# Allegro board mithrilpoosack_alt.brd
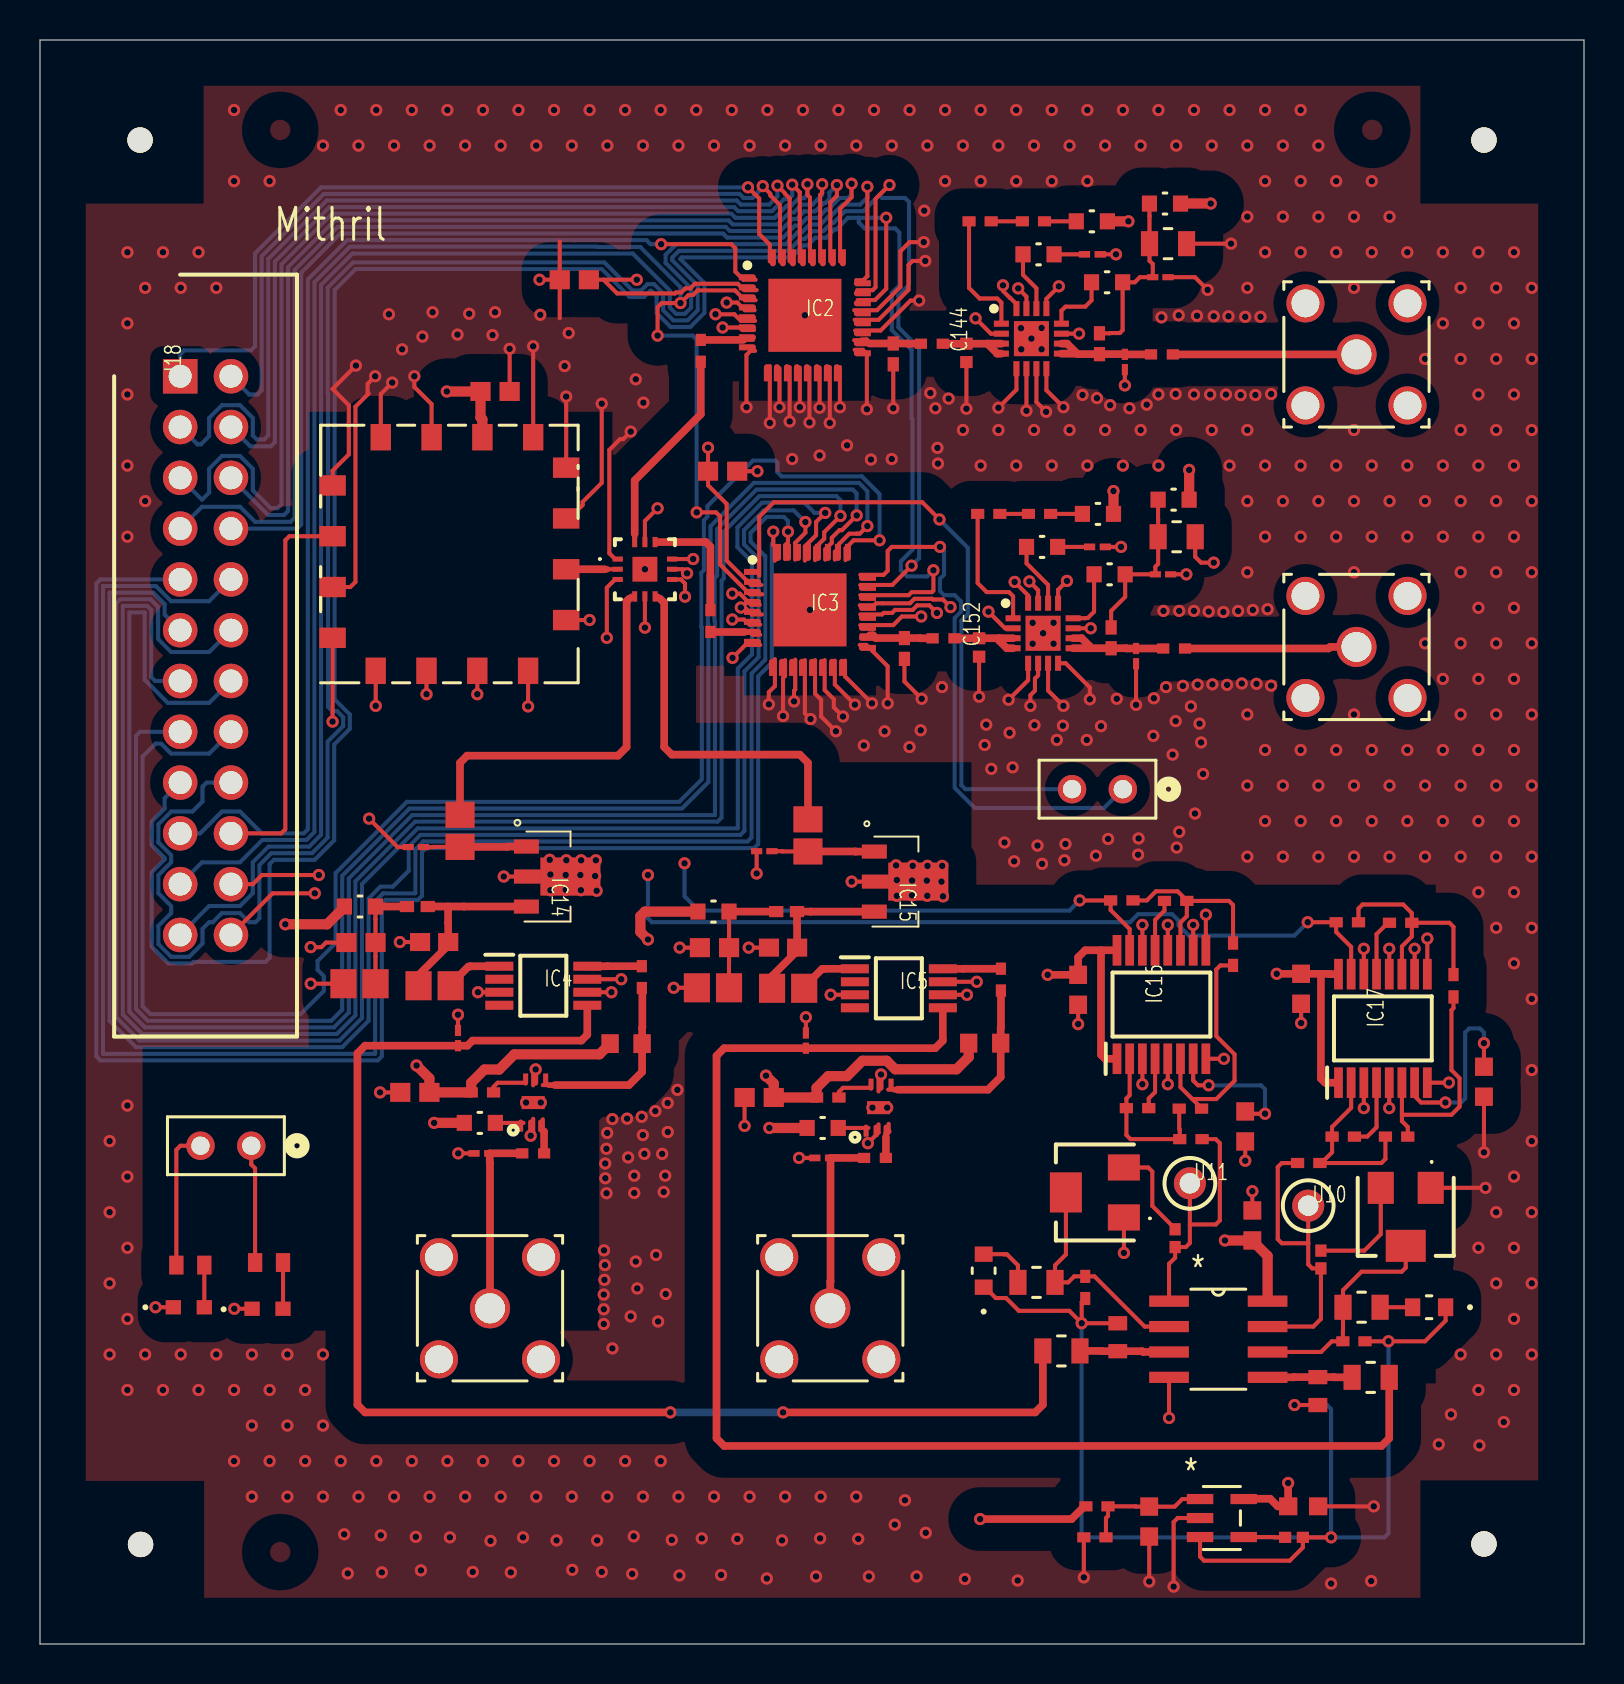
[diagram p0: board, top side]
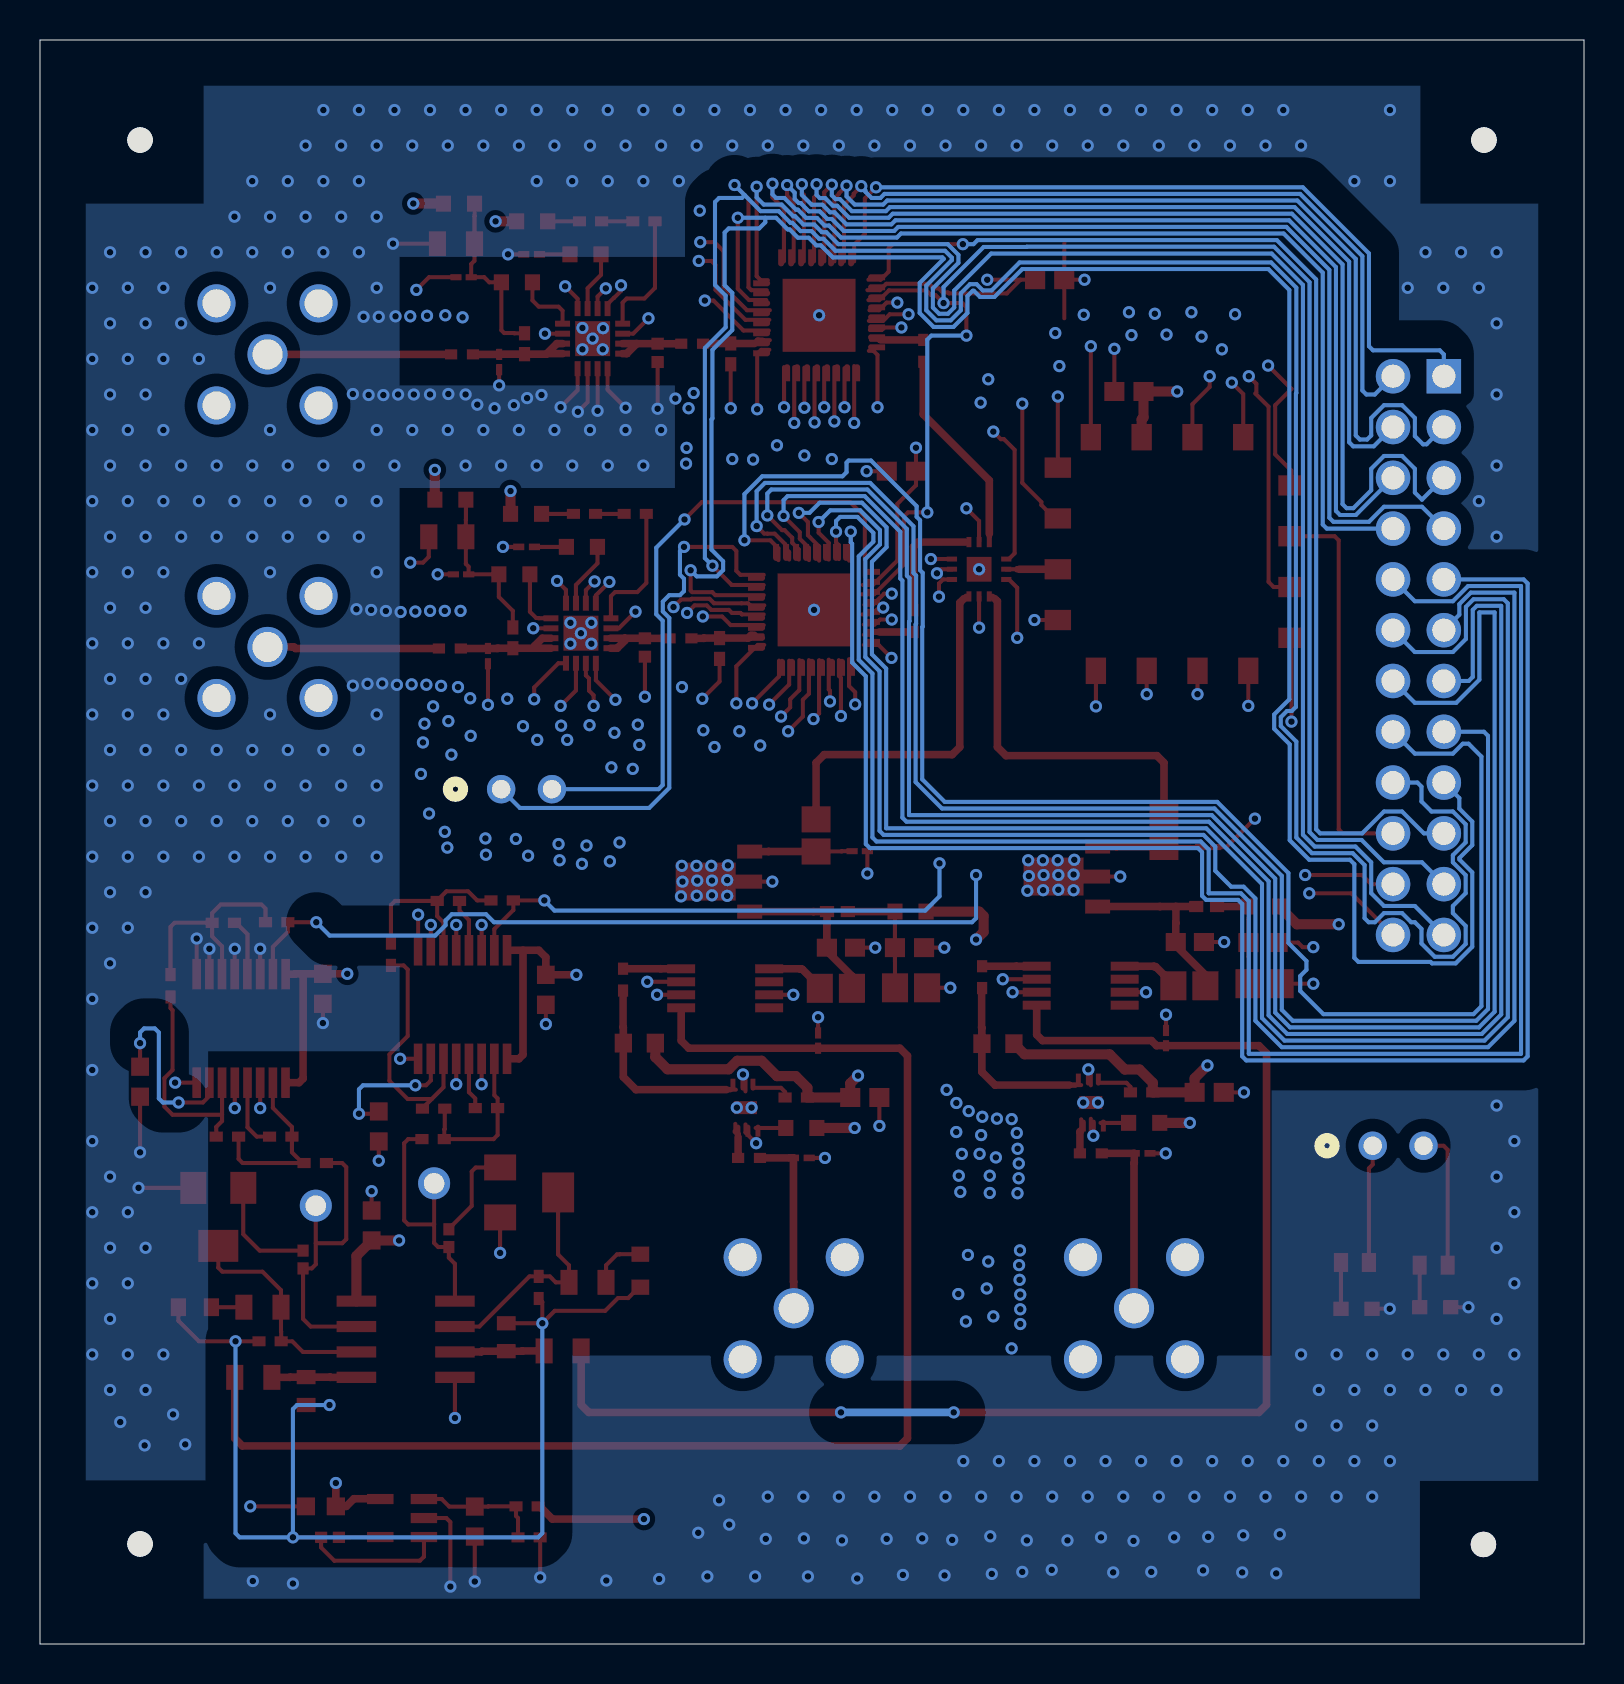
[diagram p1: board, bottom side, seen from below]

Outline 77.22 x 80.21 mm; copper layers: TOP, GND, PWR, BOTTOM. Coordinates in mm from the lower left corner of the outline.
Outline path: 0,80.21 77.22,80.21 77.22,0 0,0 0,80.21

## Design rules (mm)
constraint set DEFAULT: min track width 0.203

## Placement (name value [footprint] x y rotation side)
C89  22 pF  [CAPC220145_90N_KEM]  38.4 40.44 270 top
C91  22 pF  [CAPC220145_90N_KEM]  37.41 32.79 0 top
C92  1.1pF  [CAPC17090_87N_KEM]  37.16 34.82 0 top
C94  2.2uF  [CAPC220145_140N_KEM]  33.66 32.82 0 top
C107  22 pF  [CAPC220145_90N_KEM]  21.01 40.67 270 top
C109  100pF  [G-033_MUR]  38.3 30.18 270 top
C110  1.1pF  [CAPC17090_87N_KEM]  19.71 35.1 0 top
C111  2.2uF  [CAPC220145_140N_KEM]  15.98 33.02 0 top
C112  100pF  [G-033_MUR]  20.9 30.3 90 top
C124  1.5pF  [G-033_MUR]  18.8 39.85 0 top
C125  1.5pF  [G-033_MUR]  36.22 39.65 0 top
C127  0.1 uF  [CAPC17595_95N_KEM]  16.05 35.08 0 top
C128  0.1 uF  [CAPC17595_95N_KEM]  33.73 34.82 0 top
C130  100nF  [CAP_885012206_WRE]  55.47 6.12 90 top
C131  100nF  [CAP_885012206_WRE]  63.17 6.88 180 top
C132  47uF  [CAP_CL21_SAM]  49.83 18.08 0 top
C133  10uF  [CAP_CL21_SAM]  51.08 14.66 0 top
C134  100nF  [CAP_885012206_WRE]  60.63 20.93 270 top
C135  10uF  [CAP_CL21_SAM]  66.55 13.34 0 top
C136  47uF  [CAP_CL21_SAM]  66.09 16.84 180 top
C143  1.8pF  [G-155_MUR]  44.6 65.02 0 top
C144  3pF  [CAPC1005X55N]  46.33 64.57 90 top
C145  10uF  [CAP_CL21_SAM]  56.41 70.03 0 top
C146  100pF  [G-033_MUR]  56.03 68.35 180 top
C147  3.3pF  [G-033_MUR]  54.25 64.11 90 top
C148  33pF  [G-155_MUR]  56.11 64.49 0 top
C149  10uF  [CAP_CL21_SAM]  56.85 55.37 0 top
C150  100pF  [G-033_MUR]  56.16 53.49 180 top
C151  1.8pF  [G-155_MUR]  45.19 50.29 0 top
C152  3pF  [CAPC1005X55N]  46.96 49.83 90 top
C153  33pF  [G-155_MUR]  56.72 49.78 0 top
C154  3.3pF  [G-033_MUR]  54.81 49.4 90 top
C155  33pF  [G-155_MUR]  24.66 24.54 0 top
C156  0.1 uF  [CAPC17595_95N_KEM]  18.75 27.58 0 top
C157  33pF  [G-155_MUR]  30.1 33.35 90 top
C158  0.1 uF  [CAPC17595_95N_KEM]  35.97 27.33 0 top
C159  33pF  [G-155_MUR]  41.76 24.31 0 top
C160  33pF  [G-155_MUR]  48.06 33.22 90 top
C161  33pF  [G-155_MUR]  33.05 64.67 90 top
C162  33pF  [G-155_MUR]  33.53 51.16 270 top
C163  0.1 uF  [CAPC17595_95N_KEM]  22.76 62.64 0 top
C164  0.1 uF  [CAPC17595_95N_KEM]  26.72 68.22 180 top
C165  0.1 uF  [CAPC17595_95N_KEM]  34.14 58.65 0 top
C166  22 pF  [CAPC220145_90N_KEM]  19.74 32.92 180 top
C167  100nF  [CAP_885012206_WRE]  60.27 25.88 90 top
C168  100nF  [CAP_885012206_WRE]  51.92 32.72 90 top
C169  100nF  [CAP_885012206_WRE]  63.07 32.77 90 top
C170  100nF  [CAP_885012206_WRE]  72.21 28.12 90 top
IC2  PE44820B-X  [QFN50P500X500X90-33N-D]  38.25 66.45 0 top
IC3  PE44820B-X  [QFN50P500X500X90-33N-D]  38.51 51.71 0 top
IC4  HMC400MS8ETR  [SOP65P488X110-8N]  25.17 32.92 0 top
IC5  HMC400MS8ETR  [SOP65P488X110-8N]  42.95 32.79 0 top
IC8  WP4P1+  [WP4P1]  30.25 53.75 0 top
IC9  GRF5112  [QFN50P300X300X90-17N]  49.58 65.28 0 top
IC10  GRF5112  [QFN50P300X300X90-17N]  50.16 50.55 0 top
IC12  GRF2133W  [SON50P150X150X50-7N-D]  41.94 26.82 90 top
IC13  GRF2133W  [SON50P150X150X50-7N-D]  24.66 27.08 90 top
IC14  -  [MMG3014NT1]  25.43 38.38 270 top
IC15  -  [MMG3014NT1]  42.82 38.13 270 top
IC16  LTC1563-2IGN#PBF  [SOP64P601X175-16N]  56.08 31.98 90 top
IC17  LTC1563-2IGN#PBF  [SOP64P601X175-16N]  67.16 30.78 90 top
J6  CONN_001P_000C_1  [CONN_RF2-04A-T-00-50-G_ADM]  22.5 16.79 0 top
J7  CONN_001P_000C_1  [CONN_RF2-04A-T-00-50-G_ADM]  39.52 16.79 0 top
J8  CONN_001P_000C_1  [CONN_RF2-04A-T-00-50-G_ADM]  65.84 64.49 0 top
J9  CONN_001P_000C_1  [CONN_RF2-04A-T-00-50-G_ADM]  65.84 49.86 0 top
J18  1-5103308-3  [SHDR24W66P254_2X12_3797X914X986P]  7.01 63.4 90 top
J19  CONN2_M20-999_1x2  [CONN2_M20-999_1X2_HRW]  10.57 24.92 0 top
J20  CONN2_M20-999_1x2  [CONN2_M20-999_1X2_HRW]  54.15 42.75 0 top
L17  2nH  [IND_LQG15_MUR]  42.67 64.52 270 top
L18  3nH  [IND_LQP03TN_MUR]  52.63 69.49 180 top
L19  10nH  [IND_LQG15HS10NJ02D_MUR]  52.98 65.02 270 top
L20  3nH  [IND_LQP03TN_MUR]  52.88 54.86 180 top
L21  10nH  [IND_LQG15HS10NJ02D_MUR]  53.57 50.32 270 top
L22  2nH  [IND_LQG15_MUR]  43.23 49.78 270 top
L23  18nH  [IND_LQP03TN_MUR]  22.1 24.54 180 top
L24  33nH  [IND_LQG18HN_MUR]  29.31 30.02 0 top
L25  IND  [IND_LQG18HN_MUR]  47.24 30.05 0 top
L26  18nH  [IND_LQP03TN_MUR]  39.14 24.31 180 top
L27  15nH  [IND_LQG15HN_02_MUR]  37.34 36.63 0 top
L28  15nH  [IND_LQG15HN_02_MUR]  18.87 36.88 0 top
LED1  LED  [LED_LTST-C191KGKT_LTO]  11.38 16.76 0 top
LED2  LED  [LED_LTST-C191KGKT_LTO]  7.44 16.84 0 top
NOREF  -  [unnamed]  72.21 75.21 0 top
NOREF#2  -  [#2]  73.66 80.21 90 top
NOREF#3  -  [unnamed]  72.21 5 0 top
NOREF#4  -  [#2]  0 80.21 0 top
NOREF#5  -  [#2]  -43.41 -68.45 0 top
NOREF#6  -  [#2]  0 156.87 0 top
NOREF#7  -  [unnamed]  5 75.21 0 top
NOREF#8  -  [#2]  77.22 0 90 top
NOREF#9  -  [unnamed]  5.03 4.98 0 top
R18  47K  [RC0402N_PAN]  52.86 6.88 0 top
R19  47K  [RC0402N_PAN]  52.76 5.33 180 top
R21  1k  [STA_RMCF0402_STP]  56.77 20.29 270 top
R23  1.5k  [RC0402N_PAN]  52.27 17.83 270 top
R44  4.7k  [STA_RMCF0603_STP]  53.9 15.34 90 top
R45  4.7k  [STA_RMCF0603_STP]  63.91 12.65 270 top
R46  1k  [STA_RMCF0402_STP]  64.06 19.23 270 top
R47  50  [RES_RT0603_YAG]  47.19 18.67 90 top
R50  1.5k  [RC0402N_PAN]  65.71 15.14 0 top
R51  50  [RES_RT0603_YAG]  69.47 16.84 180 top
R52  0  [RC0603N_PAN]  33.68 36.63 0 top
R55  0  [RC0603N_PAN]  16 36.88 0 top
R76  3k  [RC0603N_PAN]  52.6 71.15 180 top
R77  2k  [RC0402N_PAN]  49.68 71.15 180 top
R78  1.5k  [RC0402N_PAN]  47.02 71.15 180 top
R79  0  [RC0603N_PAN]  49.94 69.49 180 top
R80  0  [RC0603N_PAN]  56.26 72.03 180 top
R81  0  [RC0603N_PAN]  53.37 68.1 0 top
R82  0  [RC0603N_PAN]  56.69 57.23 180 top
R83  3k  [RC0603N_PAN]  52.91 56.52 180 top
R84  0  [RC0603N_PAN]  50.11 54.86 180 top
R85  2k  [RC0402N_PAN]  49.99 56.52 180 top
R86  1.5k  [RC0402N_PAN]  47.45 56.52 180 top
R87  0  [RC0603N_PAN]  53.49 53.49 0 top
R88  3k  [RC0603N_PAN]  22 26.06 0 top
R89  75  [RC0402N_YAG]  22.12 27.58 0 top
R90  3k  [RC0603N_PAN]  39.14 25.81 0 top
R91  75  [RC0402N_YAG]  39.4 27.33 0 top
R94  1k  [STA_RMCF0603_STP]  11.46 19.08 0 top
R95  1k  [STA_RMCF0603_STP]  7.52 18.95 0 top
R97  90.9k  [RC0402N_YAG]  57.53 26.77 180 top
R98  90.9k  [RC0402N_YAG]  57.56 25.25 0 top
R99  90.9k  [RC0402N_YAG]  59.66 34.49 270 top
R100  90.9k  [RC0402N_YAG]  56.79 37.16 0 top
R101  90.9k  [RC0402N_YAG]  54.1 37.19 0 top
R102  90.9k  [RC0402N_YAG]  54.89 26.8 180 top
R103  90.9k  [RC0402N_YAG]  65.38 36.09 0 top
R104  90.9k  [RC0402N_YAG]  65.18 25.37 180 top
R105  90.9k  [RC0402N_YAG]  68.05 36.07 0 top
R106  90.9k  [RC0402N_YAG]  67.84 25.37 180 top
R107  90.9k  [RC0402N_YAG]  70.69 32.92 270 top
R108  90.9k  [RC0402N_YAG]  63.45 24.05 180 top
R109  1k  [STA_RMCF0402_STP]  62.71 5.33 180 top
U7  MCP6001UT-IOT  [SOT-23-5_MC_MCH]  59.11 6.3 0 top
U8  LM2904_D_8  [D8]  58.93 15.24 0 top
U10  -  [5002]  63.42 21.92 0 top
U11  -  [5002]  57.51 23.04 0 top
VR1  PVG5A503C03R00  [PVG5A502C03R00]  68.3 21.36 180 top
VR2  PVG5A503C03R00  [PVG5A502C03R00]  52.76 22.58 90 top
XTAL1  CVCO55BE-1530-2700  [CVCO55BE-1530-2700_CRX]  20.47 54.51 0 top

## Library data of the parts
C89 C91 C107 C166 = C0805C220J5GAC7210: User Part Number: PN; Tolerance: TOL
C92 C110 = CBR06C119B5GAC: User Part Number: PN; Tolerance: TOL
C94 C111 = C0805C225J4RACTU: User Part Number: PN; Tolerance: TOL
C109 C112 C146 C150 = GRM0335C1H101JA01D: User Part Number: PN; Tolerance: TOL
C124 C125 = GRM0335C1H1R5CA01D: User Part Number: PN; Tolerance: TOL
C127 C128 C156 C158 C163-C165 = C0603C104J5RACTU: User Part Number: PN; Tolerance: TOL
C130 C131 C134 C167-C170 = 885012206071: User Part Number: PN; Tolerance: TOL
C132 C136 = CL21A476MRYNNNE: User Part Number: PN; Tolerance: TOL
C133 C135 C145 C149 = CL21A106KOQNNNE: User Part Number: PN; Tolerance: TOL
C143 C151 = GRM1555C1H1R8CA01D: User Part Number: PN; Tolerance: TOL
C144 C152 = GRM1555C1H3R0CA01D
C147 C154 = GRM0335C1H3R3CA01D: User Part Number: PN; Tolerance: TOL
C148 C153 C155 C157 C159-C162 = GRM1555C1H330JA01D: User Part Number: PN; Tolerance: TOL
IC2 IC3 = PE44820B-X
IC4 IC5 = HMC400MS8ETR
IC8 = WP4P1+_0
IC9 IC10 = GRF5112
IC12 IC13 = GRF2133W
IC14 IC15 = MMG3014NT1_0
IC16 IC17 = LTC1563-2IGN#PBF
J6-J9 = RF2-04A-T-00-50-G: User Part Number: PN; Tolerance: TOL
J18 = 1-5103308-3
J19 J20 = M20-9990246: User Part Number: PN; Tolerance: TOL
L17 L22 = LQG15HS2N0S02D: User Part Number: PN; Tolerance: TOL
L18 L20 = LQP03TN3N0B02D: User Part Number: PN; Tolerance: TOL
L19 L21 = LQG15HS10NJ02D: User Part Number: PN; Tolerance: TOL
L23 L26 = LQP03TN18NH02D: User Part Number: PN; Tolerance: TOL
L24 L25 = LQG18HN33NJ00D: User Part Number: PN; Tolerance: TOL
L27 L28 = LQG15HS15NJ02D: User Part Number: PN; Tolerance: TOL
LED1 LED2 = LTST-C191KGKT: User Part Number: PN; Tolerance: TOL
R18 R19 = ERJ-2RKF4702X: User Part Number: PN; Tolerance: TOL
R21 R46 R109 = RMCF0402FT1K00: User Part Number: PN; Tolerance: TOL
R23 R50 R78 R86 = ERA-2AEB152X: User Part Number: PN; Tolerance: TOL
R44 R45 = RMCF0603FT4K70: User Part Number: PN; Tolerance: TOL
R47 R51 = RT0603BRE0750RL: User Part Number: PN; Tolerance: TOL
R52 R55 R79-R82 R84 R87 = ERJ-3GEY0R00V: User Part Number: PN; Tolerance: TOL
R76 R83 R88 R90 = ERA-3AEB302V: User Part Number: PN; Tolerance: TOL
R77 R85 = ERJ-2RKF2001X: User Part Number: PN; Tolerance: TOL
R89 R91 = RC0402FR-0775RL: User Part Number: PN; Tolerance: TOL
R94 R95 = RMCF0603FT1K00: User Part Number: PN; Tolerance: TOL
R97-R108 = RC0402FR-0790K9L: User Part Number: PN; Tolerance: TOL
U7 = MCP6001UT-IOT: User Part Number: PN; Tolerance: TOL
U8 = LM2904DR: User Part Number: PN; Tolerance: TOL
U10 U11 = 5002
VR1 VR2 = PVG5A503C03R00
XTAL1 = CVCO55BE-1530-2700: User Part Number: PN; Tolerance: TOL

## Footprints (pads in the part's own frame, mm; a bottom-side part is the same pattern mirrored in y, then rotated)
5002
  round 1.6 hole 1.021: 1(0,0)
CAP_885012206_WRE
  rect 0.914x0.889 smd: 1(-0.749,0) 2(0.749,0)
CAP_CL21_SAM
  rect 0.856x1.25 smd: 1(-0.927,0) 2(0.927,0)
CAPC1005X55N
  rect 0.599x0.62 smd: 1(-0.46,0) 2(0.46,0)
CAPC17090_87N_KEM
  rect 1.006x0.899 smd: 1(-0.704,0) 2(0.704,0)
CAPC17595_95N_KEM
  rect 1.006x0.95 smd: 1(-0.729,0) 2(0.729,0)
CAPC220145_90N_KEM
  rect 1.306x1.45 smd: 1(-0.803,0) 2(0.803,0)
CAPC220145_140N_KEM
  rect 1.306x1.45 smd: 1(-0.803,0) 2(0.803,0)
CONN2_M20-999_1X2_HRW
  round 1.422 hole 0.914: 1(0,0) 2(-2.54,0)
CONN_RF2-04A-T-00-50-G_ADM
  round 1.905 hole 1.397: (-2.553,2.553) (-2.553,-2.553) (2.553,2.553) (2.553,-2.553)
  round 2.007 hole 1.499: 1(0,0)
CVCO55BE-1530-2700_CRX
  rect 1.321x1.016 smd: 1(-5.842,3.429) 2(-5.842,0.889) 3(-5.842,-1.651) 4(-5.842,-4.191) 9(5.842,-3.302) 10(5.842,-0.762) 11(5.842,1.778) 12(5.842,4.318)
  rect 1.016x1.321 smd: 5(-3.683,-5.842) 6(-1.143,-5.842) 7(1.397,-5.842) 8(3.937,-5.842) 13(4.191,5.842) 14(1.651,5.842) 15(-0.889,5.842) 16(-3.429,5.842)
D8
  rect 1.981x0.559 smd: 1(-2.464,1.905) 2(-2.464,0.635) 3(-2.464,-0.635) 4(-2.464,-1.905) 5(2.464,-1.905) 6(2.464,-0.635) 7(2.464,0.635) 8(2.464,1.905)
G-033_MUR
  rect 0.559x0.305 smd: 1(-0.381,0) 2(0.381,0)
G-155_MUR
  rect 0.61x0.508 smd: 1(-0.546,0) 2(0.546,0)
IND_LQG15_MUR
  rect 0.711x0.559 smd: 1(-0.521,0) 2(0.521,0)
IND_LQG15HN_02_MUR
  rect 0.711x0.559 smd: 1(-0.521,0) 2(0.521,0)
IND_LQG15HS10NJ02D_MUR
  rect 0.711x0.559 smd: 1(-0.521,0) 2(0.521,0)
IND_LQG18HN_MUR
  rect 0.864x0.94 smd: 1(-0.8,0) 2(0.8,0)
IND_LQP03TN_MUR
  rect 0.559x0.33 smd: 1(-0.394,0) 2(0.394,0)
LED_LTST-C191KGKT_LTO
  rect 0.762x0.711 smd: 1(-0.775,0) 2(0.775,0)
MMG3014NT1
  rect 0.701x1.25 smd: 1(-1.501,-1.1) 3(1.501,-1.1)
  rect 0.701x1.349 smd: 2(0,-1.049)
  rect 1.9x3 smd: 4(0,1.1)
PVG5A502C03R00
  rect 1.3x1.6 smd: 1(-1.25,-1.45) 3(1.25,-1.45)
  rect 1.999x1.6 smd: 2(0,1.45)
QFN50P300X300X90-17N
  rect 0.749x0.3 smd: 1(-1.501,0.749) 2(-1.501,0.249) 3(-1.501,-0.249) 4(-1.501,-0.749) 9(1.501,-0.749) 10(1.501,-0.249) 11(1.501,0.249) 12(1.501,0.749)
  rect 0.3x0.749 smd: 5(-0.749,-1.501) 6(-0.249,-1.501) 7(0.249,-1.501) 8(0.749,-1.501) 13(0.749,1.501) 14(0.249,1.501) 15(-0.249,1.501) 16(-0.749,1.501)
  rect 1.75x1.75 smd: 17(0,0)
QFN50P500X500X90-33N-D
  custom 0.851x0.3 smd: 1(-2.875,1.9) 2(-2.875,1.4) 3(-2.875,0.899) 4(-2.875,0.399) 5(-2.875,-0.099) 6(-2.875,-0.599) 7(-2.875,-1.1) 8(-2.875,-1.6) 17(2.875,-1.9) 18(2.875,-1.4) 19(2.875,-0.899) 20(2.875,-0.399) 21(2.875,0.099) 22(2.875,0.599) 23(2.875,1.1) 24(2.875,1.6)
  custom 0.3x0.851 smd: 9(-1.9,-2.875) 10(-1.4,-2.875) 11(-0.899,-2.875) 12(-0.399,-2.875) 13(0.099,-2.875) 14(0.599,-2.875) 15(1.1,-2.875) 16(1.6,-2.875) 25(1.9,2.875) 26(1.4,2.875) 27(0.899,2.875) 28(0.399,2.875) 29(-0.099,2.875) 30(-0.599,2.875) 31(-1.1,2.875) 32(-1.6,2.875)
  rect 3.65x3.65 smd: 33(0,0)
RC0402N_PAN
  rect 0.655x0.5 smd: 1(-0.554,0) 2(0.554,0)
RC0402N_YAG
  rect 0.66x0.508 smd: 1(-0.559,0) 2(0.559,0)
RC0603N_PAN
  rect 0.757x0.8 smd: 1(-0.777,0) 2(0.777,0)
RES_RT0603_YAG
  rect 0.762x0.889 smd: 1(-0.826,0) 2(0.826,0)
SHDR24W66P254_2X12_3797X914X986P
  rect 1.725x1.725 hole 1.151: 1(0,0)
  round 1.725 hole 1.151: 2(0,-2.54) 3(-2.54,0) 4(-2.54,-2.54) 5(-5.08,0) 6(-5.08,-2.54) 7(-7.62,0) 8(-7.62,-2.54) 9(-10.16,0) 10(-10.16,-2.54) 11(-12.7,0) 12(-12.7,-2.54) 13(-15.24,0) 14(-15.24,-2.54) 15(-17.78,0) 16(-17.78,-2.54) 17(-20.32,0) 18(-20.32,-2.54) 19(-22.86,0) 20(-22.86,-2.54) 21(-25.4,0) 22(-25.4,-2.54) 23(-27.94,0) 24(-27.94,-2.54)
SON50P150X150X50-7N-D
  custom 0.599x0.249 smd: 1(-1.151,0.625) 2(-1.151,0.124) 3(-1.151,-0.376) 4(1.151,-0.625) 5(1.151,-0.124) 6(1.151,0.376)
  rect 0.65x1.151 smd: 7(0,0)
SOP64P601X175-16N
  rect 1.527x0.434 smd: 1(-2.713,2.223) 2(-2.713,1.587) 3(-2.713,0.953) 4(-2.713,0.318) 5(-2.713,-0.318) 6(-2.713,-0.953) 7(-2.713,-1.587) 8(-2.713,-2.223) 9(2.713,-2.223) 10(2.713,-1.587) 11(2.713,-0.953) 12(2.713,-0.318) 13(2.713,0.318) 14(2.713,0.953) 15(2.713,1.587) 16(2.713,2.223)
SOP65P488X110-8N
  rect 1.4x0.45 smd: 1(-2.2,0.975) 2(-2.2,0.325) 3(-2.2,-0.325) 4(-2.2,-0.975) 5(2.2,-0.975) 6(2.2,-0.325) 7(2.2,0.325) 8(2.2,0.975)
SOT-23-5_MC_MCH
  rect 1.321x0.508 smd: 1(-1.092,0.95) 2(-1.092,0) 3(-1.092,-0.95) 4(1.092,-0.95) 5(1.092,0.95)
STA_RMCF0402_STP
  rect 0.61x0.559 smd: 1(-0.445,0) 2(0.445,0)
STA_RMCF0603_STP
  rect 0.711x0.94 smd: 1(-0.699,0) 2(0.699,0)
unnamed
  round 1.27 hole 3.962 unplated: (0,0)
WP4P1
  rect 0.511x0.249 smd: 1(-1.359,0.511) 2(-1.359,0) 3(-1.359,-0.511) 7(1.359,-0.511) 8(1.359,0) 9(1.359,0.511)
  rect 0.249x0.511 smd: 4(-0.511,-1.359) 5(0,-1.359) 6(0.511,-1.359) 10(0.511,1.359) 11(0,1.359) 12(-0.511,1.359)
  rect 1.24x1.24 smd: 13(0,0)

## Nets
3.3V: C131.2 C134.2 C164.1 C165.1 C168.2 C169.2 IC2.2 IC3.2 IC16.1 IC16.16 IC17.1 IC17.16 J19.2 R18.1 R95.1 U7.5 U8.8(VCC)
5.0V: C156.2 C158.2 C163.1 J19.1 L24.1 L25.1 R52.1 R55.1 R76.1 R80.1 R82.1 R83.1 R88.1 R89.1 R90.1 R91.1 R94.1 XTAL1.14
GND: C92.1 C94.1 C109.1 C110.1 C111.1 C112.2 C124.1 C125.1 C127.1 C128.1 C130.1 C131.1 C134.1 C144.1 C145.2 C146.1 C147.1 C149.2 C150.1 C152.1 C154.1 C156.1 C158.1 C163.2 C164.2 C165.2 C167.1 C168.1 C169.1 C170.1 IC2.4 IC2.5 IC2.6 IC2.8 IC2.9 IC2.10 IC2.11 IC2.12 IC2.13 IC2.14 IC2.15 IC2.16 IC2.17 IC2.19 IC2.20(VSS_EXT) IC2.21 IC2.33 IC3.4 IC3.5 IC3.6 IC3.8 IC3.9 IC3.10 IC3.11 IC3.12 IC3.13 IC3.14 IC3.15 IC3.16 IC3.17 IC3.19 IC3.20(VSS_EXT) IC3.21 IC3.33 IC4.3 IC4.6 IC4.7 IC5.3 IC5.6 IC5.7 IC8.1 IC8.3 IC8.5 IC8.7 IC8.8 IC8.9 IC8.11 IC8.13 IC9.2 IC9.5 IC9.6 IC9.7 IC9.8 IC9.11 IC9.13 IC9.15 IC9.16 IC9.17 IC10.2 IC10.5 IC10.6 IC10.7 IC10.8 IC10.11 IC10.13 IC10.15 IC10.16 IC10.17 IC12.2 IC12.5 IC12.7 IC13.2 IC13.5 IC13.7 IC14.2 IC14.4 IC15.2 IC15.4 IC16.3 IC16.5 IC16.8(V-) IC16.9 IC16.10 IC16.12 IC16.14 IC17.3 IC17.5 IC17.8(V-) IC17.9 IC17.10 IC17.12 IC17.14 L17.2 L18.1 L20.1 L22.2 L23.2 L26.2 LED1.1(CATHODE) LED2.1(CATHODE) R19.2 U7.2(VSS) U8.4 VR1.1 VR2.1 XTAL1.1 XTAL1.3 XTAL1.4 XTAL1.5 XTAL1.6 XTAL1.7 XTAL1.8 XTAL1.9 XTAL1.11 XTAL1.12 XTAL1.13 XTAL1.15 XTAL1.16
1OUT: R21.2 R98.2 U8.1 U11.1
2OUT: R46.2 R108.2 U8.7 U10.1
D0: IC2.32 J18.1
D1: IC2.31 J18.2
D2: IC2.30 J18.3
D3: IC2.29 J18.4
D4: IC2.28 J18.5
D5: IC2.27 J18.6
D6: IC2.26 J18.7
D7: IC2.25 J18.8
D8: IC3.32 J18.9
D9: IC3.31 J18.10
D10: IC3.30 J18.11
D11: IC3.29 J18.12
D12: IC3.28 J18.13
D13: IC3.27 J18.14
D14: IC3.26 J18.15
D15: IC3.25 J18.16
FILTEREDIF1: IC16.15 J18.22 R101.1
FILTEREDIF2: IC17.15 J18.24 R103.1
IF1: C112.1 C133.1 IC4.5
IF2: C109.2 C135.2 IC5.5
LATCH ENABLE: IC2.22 IC3.22 J18.17
LO1: C107.1 IC8.4
LO2: C89.1 IC8.6
OPT: IC2.1 J18.19
OPT2: IC3.1 J20.2
RFIN: C155.1 J6.1 L23.1
RFOUT: IC8.2(SUM_PORT) XTAL1.10
SERIAL CLOCK: IC2.23 IC3.23 J18.18
SERIAL INPUT: IC2.24 J18.23
SERIAL INPUT2: IC3.24 J20.1
SERIAL/PARALLEL: IC2.3 IC3.3 J18.21
VG: R23.2 R44.2 R45.2 R47.1 R50.2 R51.1 R109.1 U7.3
VTUNE: J18.20 XTAL1.2
N20387: C94.2 C128.2 L27.1 R52.2
N20505: C89.2 C125.2 IC15.1
N20513: C91.1 C92.2 IC15.3(RFOUT/DC_SUPPLY) L27.2
N20525: C91.2 IC5.1
N21779: C111.2 C127.2 L28.1 R55.2
N21911: C107.2 C124.2 IC14.1
N21919: C110.2 C166.2 IC14.3(RFOUT/DC_SUPPLY) L28.2
N21931: C166.1 IC4.1
N24382: C130.2 R18.2 R19.1 U7.1
N26627: C135.1 R45.1 U8.5
N27571: R46.1 VR1.3
N27840: C136.2 R50.1 U8.6 VR1.2(WIPER)
N29245: C133.2 R44.1 U8.3
N29273: C132.2 R23.1 U8.2 VR2.2(WIPER)
N36972: C161.2 IC2.7
N37084: C162.2 IC3.7
N37086: C151.1 IC3.18 L22.1
N37118: C162.1 IC8.10
N46082: C136.1 R51.2
N63774: R21.1 VR2.3
N69862: C132.1 R47.2
N90361: C161.1 IC8.12
N94399: C143.1 IC2.18 L17.1
N94665: C143.2 C144.2 IC9.3 IC9.4
N95021: IC9.1(VEN1) R78.2
N95051: IC9.14 R79.2
N95080: L18.2 R79.1
N95927: C145.1 C146.2 L19.1 R80.2 R81.2
N96935: IC9.12 R81.1
N96980: C147.2 C148.1 IC9.9 IC9.10 L19.2
N97603: C148.2 J8.1
N98654: L20.2 R84.1
N98662: C149.1 C150.2 L21.1 R82.2 R87.2
N98730: IC10.14 R84.2
N98860: IC10.1(VEN1) R86.2
N98864: IC10.12 R87.1
N98900: C151.2 C152.2 IC10.3 IC10.4
N98916: C153.1 C154.2 IC10.9 IC10.10 L21.2
N99024: C153.2 J9.1
N106848: IC13.1(VENABLE) R88.2
N107570: C155.2 IC13.3
N108106: IC13.6 R89.2
N108220: C157.1 IC13.4 L24.2
N108858: C157.2 IC4.8(RF)
N110675: IC12.1(VENABLE) R90.2
N110679: IC12.6 R91.2
N110739: C159.1 J7.1 L26.1
N110747: C159.2 IC12.3
N110751: C160.1 IC12.4 L25.2
N110932: C160.2 IC5.8(RF)
N113166: LED1.2 R94.2
N113220: LED2.2 R95.2
N158860: IC16.6 R97.1 R99.2
N158864: IC16.2 R97.2 R98.1 R102.2
N159013: IC16.11 R99.1 R100.2 R101.2
N159155: IC16.13 R100.1
N159349: IC16.4 R102.1
N159369: C167.2 IC16.7
N162220: IC17.2 R104.2 R106.2 R108.1
N162236: IC17.11 R103.2 R105.2 R107.1
N162300: IC17.4 R104.1
N162304: IC17.13 R105.1
N162352: IC17.6 R106.1 R107.2
N162372: C170.2 IC17.7
N796103: R109.2 U7.4
N949111: R76.2 R77.1
N949361: R77.2 R78.1
N986741: R83.2 R85.1
N987421: R85.2 R86.1

Pads without a net: IC4 2 4; IC5 2 4

## Via types
v1: diameter 0.61, hole 0.33, TOP to BOTTOM, 691 vias

## Routing (per net, layer and track width the routed paths; a pad name or vN(x,y) marks a point on that pad's centre or on a via; arc(x,y) is an arc through that point)
3.3V: length 277.7
  TOP w0.203: 60.63,20.17 C134.2 ; C164.1 28.18,68.22 ; 28.18,68.22 28.87,67.54 31.76,67.54 31.81,67.59 32.07,67.59 32.28,67.79 32.52,67.79 32.75,68.02 34.9,68.02 35.21,67.7 35.84,67.7 ; 28.18,68.22 v1(29.84,68.22) ; v1(33.41,59.82) C165.1 33.41,57.95 34.34,57.01 34.34,54.18 35.56,52.96 36.07,52.96 ; R95.1 6.82,24.71 7.02,24.92 J19.2
  TOP w0.381: v1(47.02,6.25) 51.59,6.25 52.23,6.88 R18.1 ; 53.06,34.69 52.27,34.69 51.92,34.34 C168.2 v1(50.39,33.46) ; 53.06,34.69 53.06,29.47 53.26,29.27 IC16.1 ; 53.06,34.69 IC16.16 ; v1(61.85,33.52) C169.2 64.06,33.52 ; 64.06,33.52 64.47,33.52 64.49,33.5 IC17.16 ; 64.06,33.52 64.06,28.28 64.26,28.07 IC17.1 ; U7.5 60.21,7.26 61.52,7.26 61.9,6.88 C131.2 v1(62.42,8.05)
  TOP w0.508: C134.2 v1(59.26,20.18) ; 60.63,20.17 61.39,19.41 U8.8
  PWR w0.508: v1(61.85,33.52) 60.2,33.52 59.99,33.31 59.99,26.59 59.79,26.39 49.15,26.39 ; 49.15,26.39 49.15,33.26 49.35,33.46 v1(50.39,33.46) ; 49.15,26.39 49.15,21.03 48.95,20.83 47.32,20.83 ; 47.5,9.86 47.5,14.01 47.69,14.2 ; 47.5,9.86 62.2,9.86 62.42,9.64 v1(62.42,8.05) ; 47.5,9.86 47.5,6.73 v1(47.02,6.25) ; 47.32,20.83 9.42,20.83 8.03,22.23 J19.2 3.71,29.24 3.45,29.24 3.25,29.44 3.25,70.31 3.45,70.51 28.85,70.51 28.85,65.76 ; 47.32,20.83 47.32,14.56 47.69,14.2 ; 47.69,14.2 57.12,14.2 57.63,14.71 57.63,19.98 57.84,20.18 v1(59.26,20.18) ; 28.85,65.76 28.85,60.03 29.06,59.82 v1(33.41,59.82) ; 28.85,65.76 29.64,65.76 29.84,65.96 v1(29.84,68.22)
5.0V: length 55.5
  TOP w0.203: J19.1 10.57,23.98 10.76,23.79 R94.1
  TOP w0.508: v1(30.4,35.23) 30.03,35.61 30.03,36.4 30.25,36.63 R52.1 ; R76.1 v1(54.43,71.15) ; R82.1 v1(57.47,58.71) ; L24.1 27.98,29.49 23.72,29.49 22.96,28.73 22.23,28.73 21.56,28.07 R89.1 C156.2 19.47,28.29 v1(18.83,28.93) ; L25.1 46.44,29.35 45.83,28.74 42.77,28.74 42.34,29.17 41.13,29.17 40.36,28.4 39.42,28.4 38.84,27.81 R91.1 C158.2 36.7,28.03 v1(36.31,28.42) ; v1(20.35,62.64) C163.1 22.03,61.33 22.12,61.24 XTAL1.14 ; v1(12.27,35.99) 14.36,35.99 15.22,36.86 R55.1 ; v1(58.55,72.03) R80.1 ; v1(36.47,25.81) R90.1 ; v1(53.69,57.66) R83.1 ; v1(19.71,26.06) R88.1
  PWR w0.203: J19.1 11.97,24.92 ; J19.1 10.57,23.52 ; J19.1 10.57,26.32
GND: length 302
  TOP w0.203: IC9.7 49.83,62.11 v1(50.32,61.62) ; 37.77,49.23 37.77,47.73 37.71,47.67 v1(37.71,47.14) ; C156.1 v1(17.01,27.58) ; XTAL1.11 26.47,56.29 27.14,56.96 27.14,57.11 28.09,58.06 v1(28.09,62.03) ; 36.02,50.98 35.48,50.98 35.35,51.11 35.32,51.11 35.2,51.23 v1(34.62,51.23) ; 24.66,26.26 24.66,25.54 v1(24.54,25.42) ; IC10.6 49.92,48.44 49.76,48.28 49.76,47.68 49.53,47.45 v1(49.53,46.91) ; v1(52.5,47.24) 52.5,47.84 51.29,49.04 IC10.8 ; XTAL1.3 15.52,52.86 15.78,53.11 15.78,61.88 16.43,62.53 16.39,62.58 16.39,63.02 v1(16.76,63.4) ; v1(47.43,51.63) 48.27,50.79 IC10.2 ; XTAL1.9 v1(27.48,51.21) ; IC8.5 v1(30.25,50.83) ; C145.2 v1(59.56,70.03) ; XTAL1.13 v1(24.66,64.9) ; R19.2 v1(52.2,3.33) 52.2,3.33 ; v1(44.27,69.16) 43.64,69.16 43.43,68.96 43.43,67.72 41.94,66.22 40.74,66.22 ; v1(17.61,63.08) 17.04,62.51 XTAL1.16 ; IC10.7 50.41,47.68 v1(51.18,46.91) ; IC9.11 v1(51.96,65.53) ; v1(41.61,47.04) 40.26,48.39 40.26,49.17 ; XTAL1.15 19.58,62 18.72,62.87 v1(18.72,63.4) ; C168.1 v1(51.92,31) ; IC10.11 v1(52.55,50.79) ; L23.2 v1(20.92,24.54) ; C147.1 v1(54.25,62.94) ; IC16.9 v1(58.31,36.47) ; C169.1 v1(63.07,31.05) ; v1(44.86,51.56) 44.48,51.94 43.87,51.94 43.64,51.71 42.76,51.71 42.61,51.56 42.19,51.56 42.11,51.49 41.02,51.49 ; 36.98,63.8 v1(36.98,61.85) ; IC17.3 v1(66.21,26.8) ; IC8.8 32.16,53.75 v1(32.36,53.54) ; 39.24,49.2 39.24,47.7 39.7,47.24 39.7,46.84 v1(40.16,46.38) ; C154.1 v1(54.81,46.96) ; v1(43.97,67.18) 43.54,67.18 42.04,65.68 40.77,65.68 ; IC14.2 v1(23.19,38.38) ; v1(37.16,46.41) 37.16,48.31 37.26,48.41 37.26,49.2 ; v1(42.39,47.04) 42.39,48.9 41.33,49.96 41,49.96 ; C146.1 57.76,68.35 v1(58.39,67.72) ; C94.1 v1(31.69,32.82) ; IC10.13 50.91,52.72 v1(51.36,53.16) ; LED1.1 v1(9.72,16.76) ; C111.1 v1(13.54,33.02) ; IC16.14 v1(55.13,35.96) ; v1(40.75,46.98) 39.75,47.98 39.75,49.17 ; IC16.8 v1(59.21,29.27) ; IC8.3 28.76,53.24 28.35,52.82 v1(28.35,50.32) ; C144.1 v1(46.33,61.77) ; v1(50.95,67.89) 50.33,67.27 IC9.13 ; IC9.2 47.55,65.53 v1(46.79,66.29) ; 40.74,64.72 41.15,64.72 41.35,64.52 v1(41.35,61.75) ; v1(34.62,52.53) 35,52.53 35.56,51.97 35.99,51.97 ; v1(48.16,67.94) 48.16,67.67 48.51,67.32 48.52,67.32 48.83,67.01 IC9.16 ; IC17.5 v1(67.48,26.8) ; C167.1 v1(60.27,24.17) ; 38.25,49.2 38.25,46.54 v1(38.53,46.25) ; 36.75,49.25 36.75,47.9 36.45,47.6 v1(36.45,46.99) ; U7.2 56.9,6.3 56.69,6.1 v1(56.69,2.87) ; IC9.5 48.83,62.73 v1(47.93,61.82) ; v1(44.2,70.1) 43.48,70.1 43.03,69.65 43.03,67.87 41.86,66.7 40.72,66.7 ; v1(29.54,60.63) 29.16,60.25 29.01,60.25 28.47,59.72 28.47,54.54 28.76,54.26 IC8.1 ; C158.1 v1(35.24,25.91) ; IC8.7 32.05,53.24 32.26,53.03 v1(32.26,52.37) ; 35.71,65.71 35.13,65.71 35,65.84 v1(34.14,65.84) ; v1(49.48,53.14) 49.92,52.7 IC10.15 ; C164.2 v1(24.98,68.22) ; C164.2 25.99,70.15 ; C164.2 25.99,66.3 ; 38,63.83 v1(38,61.85) ; C110.1 v1(18,35.1) ; v1(48.92,67.79) 49.33,67.38 IC9.15 ; v1(51.18,61.85) 50.33,62.7 IC9.8 ; v1(42.06,28.48) 41.94,28.36 41.94,27.64 ; v1(48.74,53.11) 49.42,52.44 IC10.16 ; XTAL1.5 v1(16.79,46.91) ; 41.94,25.98 41.94,25.58 v1(41.4,25.04) ; LED2.1 v1(5.78,16.84) ; XTAL1.7 v1(21.87,47.5) ; 36.02,49.96 35.28,49.96 v1(34.63,49.31) ; v1(34.34,67.08) 34.87,67.08 35.26,66.7 35.74,66.7 ; 35.76,66.17 35.05,66.17 34.72,66.5 v1(33.78,66.5) ; v1(44.09,47.27) 43.23,48.13 L22.2 ; 38.99,63.83 v1(38.99,61.82) ; IC16.12 v1(56.4,35.96) ; C149.2 57.77,54.37 58.06,54.08 v1(58.7,54.08) ; IC9.6 v1(49.33,61.67) ; C170.1 v1(72.21,24.59) ; VR2.1 v1(54.21,19.56) ; v1(35.33,61.85) 35.33,64.47 35.53,64.67 35.76,64.67 ; XTAL1.8 v1(24.41,46.89) ; L18.1 v1(53.81,69.49) ; v1(15.8,63.93) 14.63,62.76 15.45,61.95 15.45,59.49 14.63,58.67 XTAL1.1 ; v1(35.05,51.83) 35.26,51.83 35.6,51.49 36.1,51.49 ; IC4.7 v1(29.07,33.24) ; IC17.12 v1(67.48,34.77) ; v1(24.79,28.74) 24.66,28.61 24.66,27.94 ; C92.1 v1(35.45,34.82) ; 39.5,63.86 v1(39.5,61.06) ; 37.49,63.86 v1(37.49,61.14) ; XTAL1.4 v1(14.63,46.13) ; IC16.3 v1(55.13,27.99) ; IC16.10 v1(57.67,35.96) ; 36.5,63.91 v1(36.5,61.06) ; 41.02,50.95 42.67,50.95 43.1,51.38 v1(44.07,51.38) ; IC17.9 v1(69.38,35.28) ; IC17.14 v1(66.21,34.77) ; C130.1 v1(55.47,3.12) ; v1(48.44,47.22) 49.42,48.2 IC10.5 ; C131.1 v1(66.7,6.88) ; IC17.8 v1(70.46,28.07) ; v1(16.46,41.27) 17.88,39.85 C124.1 ; IC5.7 v1(46.85,33.12) ; v1(13.54,34.85) 14.07,34.85 14.3,35.08 C127.1 ; C165.2 v1(35.88,58.65) ; IC5.6 v1(46.36,32.47) ; C134.1 v1(60.63,22.64) ; IC8.11 30.25,56.16 v1(30.89,56.79) ; C125.1 v1(35.84,38.53) ; C112.2 v1(20.9,31.47) ; C163.2 v1(23.49,64.77) ; C152.1 v1(46.96,47.37) ; v1(56.46,11.3) U8.4 ; C109.1 v1(38.3,31.34) ; C128.1 v1(31.99,34.82) ; L26.2 v1(37.96,24.31) ; IC4.6 v1(28.58,32.59) ; v1(45.53,51.85) 45.16,52.23 44.65,52.23 44.62,52.27 43.73,52.27 43.51,52.04 41.81,52.04 41.71,51.94 41,51.94 ; v1(32.66,54.26) IC8.9 ; v1(39.8,45.64) 39.07,46.38 39.07,47.22 38.76,47.52 38.76,49.2 ; XTAL1.12 v1(26.31,62.38) ; C150.1 v1(57.33,53.49) ; VR1.1 v1(72.29,22.81) ; 38.48,63.83 v1(38.48,61.09) ; IC17.10 v1(68.75,34.77) ; XTAL1.6 v1(19.33,47.5) ; IC16.5 v1(56.4,27.99) ; 40.01,63.86 v1(40.01,61.85) ; IC15.2 v1(40.59,38.13) ; IC5.3 v1(39.54,32.47) ; L20.1 v1(54.06,54.86) ; IC4.3 v1(21.9,32.59) ; L17.2 v1(42.67,61.8)
  GND w0.203: 41.81,65.68 41.43,65.68 ; 41.81,65.68 41.81,65.81 41.55,65.81 ; 41.81,65.68 41.55,65.43 ; 41.43,65.68 41.55,65.81 ; 41.43,65.68 41.3,65.68 ; 41.05,65.68 40.92,65.81 ; 41.05,65.68 40.92,65.68 ; 41.05,65.68 41.17,65.68 ; 41.05,65.68 40.92,65.56 ; 41.05,65.68 41.17,65.81 ; 41.55,65.81 41.43,65.81 ; 40.92,65.68 41.05,65.81 41.17,65.81 ; 40.92,65.68 40.54,65.68 ; v1(33.78,66.5) 33.88,66.5 34.16,66.22 35.71,66.22 ; 41.05,65.56 41.17,65.68 ; 41.17,65.68 41.3,65.68 ; 41.17,65.68 41.3,65.81 ; 41.43,65.81 41.3,65.81 ; 41.43,65.81 41.3,65.68 ; 41.3,65.81 41.17,65.81 ; 42.06,66.32 41.94,66.19
  vias: v1(3.48,25.15) v1(3.48,21.59) v1(3.48,18.04) v1(3.48,14.48) v1(4.37,69.6) v1(4.37,66.04) v1(4.37,62.49) v1(4.37,58.93) v1(4.37,55.37) v1(4.37,26.93) v1(4.37,23.37) v1(4.37,19.81) v1(4.37,16.26) v1(4.37,12.7) v1(5.26,67.82) v1(5.26,57.15) v1(5.26,14.48) v1(6.15,69.6) v1(6.15,12.7) v1(7.04,67.82) v1(7.04,14.48) v1(7.93,69.6) v1(7.93,12.7) v1(8.82,67.82) v1(8.82,14.48) v1(9.71,76.71) v1(9.71,73.15) v1(9.71,12.7) v1(9.71,9.15) v1(10.59,14.48) v1(10.59,10.92) v1(10.59,7.37) v1(11.48,73.15) v1(11.48,12.7) v1(11.48,9.15) v1(12.37,14.48) v1(12.37,10.92) v1(12.37,7.37) v1(13.26,12.7) v1(13.26,9.15) v1(14.15,74.93) v1(14.15,14.48) v1(14.15,10.92) v1(14.15,7.37) v1(15.04,76.71) v1(15.04,9.15) v1(15.21,5.49) v1(15.39,3.53) v1(15.93,74.93) v1(15.93,7.37) v1(16.82,76.71) v1(16.82,9.15) v1(17.04,5.44) v1(17.09,3.58) v1(17.45,66.5) v1(17.71,74.93) v1(17.71,7.37) v1(18.11,64.74) v1(18.6,76.71) v1(18.6,9.15) v1(18.8,5.36) v1(19.13,65.38) v1(19.05,3.68) v1(19.48,74.93) v1(19.48,7.37) v1(19.63,66.6) v1(20.37,76.71) v1(20.37,9.15) v1(20.5,5.33) v1(20.88,65.48) v1(21.26,74.93) v1(21.26,7.37) v1(21.46,66.52) v1(21.64,3.61) v1(22.15,76.71) v1(22.15,9.15) v1(22.53,5.16) v1(22.63,65.46) v1(22.76,66.6) v1(23.04,74.93) v1(23.04,7.37) v1(23.55,3.58) v1(23.93,76.71) v1(23.93,9.15) v1(24.16,5.33) v1(24.31,27.08) v1(24.82,74.93) v1(24.82,7.37) v1(25.02,66.47) v1(25.04,27.08) v1(25.49,39.22) v1(25.53,38.48) v1(25.53,37.69) v1(25.71,76.71) v1(25.71,9.15) v1(25.83,5.18) v1(26.24,63.91) v1(26.32,39.19) v1(26.29,38.46) v1(26.29,37.72) v1(26.44,65.56) v1(26.6,74.93) v1(26.6,7.37) v1(26.62,3.71) v1(27.03,38.46) v1(27.06,39.19) v1(27.05,37.7) v1(27.49,76.71) v1(27.49,9.15) v1(27.8,39.19) v1(27.76,38.4) v1(27.84,37.67) v1(27.86,5.18) v1(28.09,3.61) v1(28.21,19.68) v1(28.23,18.21) v1(28.19,17.48) v1(28.19,16.74) v1(28.19,16) v1(28.33,24.77) v1(28.27,24.03) v1(28.27,23.29) v1(28.33,22.54) v1(28.25,18.95) v1(28.37,74.93) v1(28.37,25.56) v1(28.37,7.37) v1(28.62,26.25) v1(28.63,14.78) v1(29.26,76.71) v1(29.26,9.15) v1(29.36,26.27) v1(29.41,24.33) v1(29.54,16.38) v1(29.62,3.51) v1(29.72,23.42) v1(29.72,22.56) v1(29.69,5.38) v1(29.79,63.25) v1(29.79,19.13) v1(29.87,17.78) v1(30.09,26.37) v1(30.15,25.45) v1(30.15,74.93) v1(30.18,62.08) v1(30.23,24.51) v1(30.15,7.37) v1(30.25,53.75) v1(30.77,26.65) v1(30.81,19.46) v1(30.91,16.13) v1(31.04,76.71) v1(31.04,9.15) v1(31.11,24.51) v1(31.19,22.61) v1(31.27,23.42) v1(31.29,17.5) v1(31.39,27.06) v1(31.39,25.6) v1(31.6,5.21) v1(31.93,74.93) v1(31.88,27.71) v1(31.93,7.37) v1(31.98,3.43) v1(32.82,76.71) v1(33.1,5.28) v1(33.71,74.93) v1(33.71,7.37) v1(34.06,3.45) v1(34.6,76.71) v1(34.87,5.26) v1(35.49,74.93) v1(35.49,7.37) v1(36.35,3.28) v1(36.38,76.71) v1(37.11,5.18) v1(37.26,74.93) v1(37.26,7.37) v1(37.62,59.26) v1(38.15,76.71) v1(38.25,66.45) v1(38.51,51.71) v1(38.81,3.38) v1(39.04,74.93) v1(38.99,59.44) v1(39.04,7.37) v1(39.01,5.28) v1(39.93,76.71) v1(40.36,59.94) v1(40.82,74.93) v1(40.82,7.37) v1(40.92,5.26) v1(41.2,44.93) v1(41.45,3.38) v1(41.55,59.23) v1(41.63,26.82) v1(41.71,76.71) v1(42.24,45.64) v1(42.37,26.82) v1(42.6,74.93) v1(42.6,59.26) v1(42.75,5.97) v1(42.81,38.94) v1(42.85,38.2) v1(42.85,37.41) v1(43.26,7.19) v1(43.49,76.71) v1(43.48,44.86) v1(43.64,38.92) v1(43.61,38.18) v1(43.61,37.44) v1(43.84,3.38) v1(44.04,45.69) v1(44.22,71.68) v1(44.35,38.18) v1(44.3,5.56) v1(44.38,74.93) v1(44.38,38.91) v1(44.37,37.42) v1(44.53,62.56) v1(44.78,61.8) v1(44.88,59.82) v1(44.91,59.03) v1(45.11,47.85) v1(45.12,38.91) v1(45.09,38.13) v1(45.16,37.39) v1(45.27,76.71) v1(45.27,73.15) v1(45.44,62.28) v1(46.15,74.93) v1(46.15,60.71) v1(46.25,3.25) v1(47.04,76.71) v1(47.04,73.15) v1(47.04,58.93) v1(47.24,44.96) v1(47.32,45.97) v1(47.57,43.76) v1(47.93,74.93) v1(47.93,60.71) v1(48.23,40.08) v1(48.49,45.57) v1(48.64,43.84) v1(48.72,39.14) v1(48.82,76.71) v1(48.82,73.15) v1(48.82,58.93) v1(48.9,3.17) v1(49.06,65.8) v1(49.07,64.74) v1(49.58,65.28) v1(49.64,51.07) v1(49.64,50.02) v1(49.71,74.93) v1(49.71,60.71) v1(49.73,45.95) v1(49.89,39.93) v1(50.09,65.81) v1(50.09,64.74) v1(50.11,39.01) v1(50.16,50.55) v1(50.6,76.71) v1(50.6,73.15) v1(50.6,58.93) v1(50.69,51.07) v1(50.69,50.02) v1(50.85,45.21) v1(51.16,45.92) v1(51.23,39.19) v1(51.28,40.01) v1(51.49,74.93) v1(51.49,60.71) v1(52.14,62.46) v1(52.35,45.21) v1(52.38,76.71) v1(52.38,73.15) v1(52.38,58.93) v1(52.81,39.42) v1(52.86,62.31) v1(53.06,45.9) v1(53.27,74.93) v1(53.27,60.71) v1(53.42,40.26) v1(53.52,61.95) v1(53.85,47.27) v1(54.16,76.71) v1(54.16,58.93) v1(54.48,61.8) v1(54.94,40.28) v1(54.91,39.47) v1(55.04,74.93) v1(55.04,60.71) v1(55.35,61.98) v1(55.7,47.29) v1(55.68,45.42) v1(55.93,76.71) v1(55.93,62.49) v1(55.93,58.93) v1(56.08,66.34) v1(56.18,51.66) v1(56.31,47.85) v1(56.64,44.48) v1(56.82,74.93) v1(56.79,62.51) v1(56.82,60.71) v1(56.79,46.15) v1(56.85,39.83) v1(56.95,66.45) v1(56.97,51.66) v1(56.97,40.61) v1(57.16,47.91) v1(57.56,46.89) v1(57.71,76.71) v1(57.71,62.49) v1(57.71,51.66) v1(57.76,41.53) v1(57.86,66.42) v1(57.89,47.97) v1(57.99,46.02) v1(58.06,45.09) v1(58.17,43.51) v1(58.45,51.63) v1(58.52,62.48) v1(58.6,74.93) v1(58.6,60.71) v1(58.63,47.99) v1(58.7,66.4) v1(59.18,51.61) v1(59.31,62.48) v1(59.44,66.4) v1(59.37,47.97) v1(59.49,76.71) v1(59.49,58.93) v1(59.92,51.66) v1(60.05,62.46) v1(60.1,48.03) v1(60.27,66.37) v1(60.38,74.93) v1(60.38,71.38) v1(60.38,67.82) v1(60.38,60.71) v1(60.38,57.15) v1(60.38,53.6) v1(60.38,46.48) v1(60.38,42.93) v1(60.38,39.37) v1(60.66,51.71) v1(60.78,62.46) v1(60.84,48.02) v1(61.04,66.37) v1(61.27,76.71) v1(61.27,73.15) v1(61.27,69.6) v1(61.27,58.93) v1(61.27,55.37) v1(61.27,44.71) v1(61.27,41.15) v1(61.39,51.75) v1(61.57,62.51) v1(61.57,47.92) v1(62.16,74.93) v1(62.16,71.38) v1(62.16,57.15) v1(62.16,42.93) v1(62.16,39.37) v1(63.05,76.71) v1(63.05,73.15) v1(63.05,69.6) v1(63.05,58.93) v1(63.05,55.37) v1(63.05,44.71) v1(63.05,41.15) v1(63.93,74.93) v1(63.93,71.38) v1(63.93,57.15) v1(63.93,42.93) v1(63.93,39.37) v1(64.57,3.02) v1(64.82,73.15) v1(64.82,69.6) v1(64.82,58.93) v1(64.82,55.37) v1(64.82,44.71) v1(64.82,41.15) v1(65.71,71.38) v1(65.71,67.82) v1(65.71,60.71) v1(65.71,57.15) v1(65.71,53.6) v1(65.71,46.48) v1(65.71,42.93) v1(65.71,39.37) v1(66.6,73.15) v1(66.6,69.6) v1(66.6,58.93) v1(66.6,55.37) v1(66.6,44.71) v1(66.6,41.15) v1(66.57,3.15) v1(67.49,71.38) v1(67.49,57.15) v1(67.49,42.93) v1(67.49,39.37) v1(68.38,69.6) v1(68.38,58.93) v1(68.38,55.37) v1(68.38,44.71) v1(68.38,41.15) v1(69.27,64.26) v1(69.27,57.15) v1(69.27,50.04) v1(69.27,42.93) v1(69.27,39.37) v1(69.95,9.98) v1(70.16,69.6) v1(70.16,66.04) v1(70.16,58.93) v1(70.16,55.37) v1(70.16,48.26) v1(70.16,44.71) v1(70.16,41.15) v1(70.56,11.48) v1(71.05,67.82) v1(71.05,64.26) v1(71.05,60.71) v1(71.05,57.15) v1(71.05,53.6) v1(71.05,50.04) v1(71.05,46.48) v1(71.05,42.93) v1(71.05,39.37) v1(71.05,14.48) v1(71.94,69.6) v1(71.94,66.04) v1(71.94,62.49) v1(71.94,58.93) v1(71.94,55.37) v1(71.94,51.82) v1(71.94,48.26) v1(71.94,44.71) v1(71.94,41.15) v1(71.94,37.59) v1(71.94,19.81) v1(71.94,12.7) v1(71.98,9.93) v1(72.82,67.82) v1(72.82,64.26) v1(72.82,60.71) v1(72.82,57.15) v1(72.82,53.6) v1(72.82,50.04) v1(72.82,46.48) v1(72.82,42.93) v1(72.82,39.37) v1(72.82,35.82) v1(72.82,21.59) v1(72.82,18.04) v1(72.82,14.48) v1(73.2,11.1) v1(73.71,69.6) v1(73.71,66.04) v1(73.71,62.49) v1(73.71,58.93) v1(73.71,55.37) v1(73.71,51.82) v1(73.71,48.26) v1(73.71,44.71) v1(73.71,41.15) v1(73.71,37.59) v1(73.71,34.04) v1(73.71,23.37) v1(73.71,19.81) v1(73.71,16.26) v1(73.71,12.7) v1(74.6,67.82) v1(74.6,64.26) v1(74.6,60.71) v1(74.6,57.15) v1(74.6,53.6) v1(74.6,50.04) v1(74.6,46.48) v1(74.6,42.93) v1(74.6,39.37) v1(74.6,35.82) v1(74.6,32.26) v1(74.6,28.7) v1(74.6,25.15) v1(74.6,21.59) v1(74.6,18.04) v1(74.6,14.48)
1OUT: length 13.1
  TOP w0.203: 57.51,20.98 U11.1 ; 57.51,20.98 57.51,20.05 57.3,19.85 R21.2 56.77,19.32 56.46,19.01 U8.1 ; 57.51,20.98 58.8,20.98 59,21.18 59,25.04 58.8,25.25 R98.2
2OUT: length 15.3
  TOP w0.203: R108.2 62.1,24.05 61.9,23.85 61.9,20.24 62.1,20.04 63.42,20.04 ; 63.42,20.04 63.42,18.99 63.63,18.78 R46.2 64.06,16.26 63.68,15.88 U8.7 ; 63.42,20.04 U10.1
D0: length 39.8
  TOP w0.203: 36.5,69.14 36.5,69.98 35.97,70.51 35.97,72.29 v1(35.41,72.85)
  BOTTOM w0.203: v1(35.41,72.85) 14.06,72.85 10.75,69.54 10.75,64.9 10.55,64.69 7.21,64.69 7.01,64.49 J18.1
D1: length 39.6
  TOP w0.203: v1(36.14,72.91) 36.52,72.53 36.52,72.44 37.01,71.96 37.01,69.14
  BOTTOM w0.203: J18.2 10.46,62.48 10.88,62.48 11.08,62.69 11.08,69.4 14.2,72.52 34.98,72.52 35.19,72.31 35.63,72.31 35.94,72.63 35.94,72.7 v1(36.14,72.91)
D2: length 47.7
  TOP w0.203: 37.49,69.14 37.49,72.29 37.26,72.52 37.26,72.55 v1(36.88,72.93)
  BOTTOM w0.203: J18.3 7.87,59.99 8.05,59.99 8.46,60.4 8.46,61.31 9.1,61.95 10,61.95 10.64,61.31 10.64,60.44 10.85,60.23 11.21,60.23 11.41,60.44 11.41,69.27 14.34,72.19 34.85,72.19 35.05,71.98 36.47,71.98 36.88,72.39 v1(36.88,72.93)
D3: length 43.7
  TOP w0.203: v1(37.62,72.98) 38,72.6 38,69.14
  BOTTOM w0.203: J18.4 10.52,59.89 11.54,59.89 11.74,60.1 11.74,69.13 14.47,71.86 34.71,71.86 34.91,71.65 36.61,71.65 37.21,72.26 37.43,72.26 37.62,72.44 v1(37.62,72.98)
D4: length 53.3
  TOP w0.203: v1(38.38,73) 38.38,72.47 38.51,72.34 38.51,69.14
  BOTTOM w0.203: J18.5 8.1,57.23 8.46,57.58 8.46,58.77 9.1,59.41 10,59.41 10.64,58.77 10.64,57.69 11.54,56.8 11.87,56.8 12.08,57 12.08,68.99 14.61,71.53 34.57,71.53 34.78,71.32 36.75,71.32 37.35,71.93 37.57,71.93 37.95,72.31 38.22,72.31 38.38,72.47 v1(38.38,73)
D5: length 48.7
  TOP w0.203: v1(39.12,73) 39.12,72.57 39.01,72.47 39.01,69.14
  BOTTOM w0.203: J18.6 11.41,56.46 12.2,56.46 12.41,56.66 12.41,68.85 14.75,71.2 34.43,71.2 34.64,70.99 36.88,70.99 37.49,71.59 37.7,71.59 38.08,71.98 38.63,71.98 39.12,72.47 v1(39.12,73)
D6: length 52.2
  TOP w0.203: v1(39.85,72.96) 39.85,72.43 39.52,72.1 39.52,69.14
  BOTTOM w0.203: J18.7 8.1,56.87 10,56.87 10.75,56.12 12.53,56.12 12.74,56.32 12.74,68.72 14.88,70.87 34.3,70.87 34.5,70.66 37.02,70.66 37.62,71.26 37.84,71.26 38.22,71.65 38.76,71.65 39.18,72.06 39.27,72.06 39.47,72.26 39.47,72.58 v1(39.85,72.96)
D7: length 50.2
  TOP w0.203: 40.01,69.14 40.01,71.77 40.59,72.35 v1(40.59,73.03)
  BOTTOM w0.203: J18.8 12.86,55.78 13.07,55.98 13.07,68.58 15.02,70.54 34.16,70.54 34.36,70.33 37.16,70.33 37.76,70.93 37.98,70.93 38.36,71.32 38.9,71.32 39.31,71.73 39.41,71.73 39.99,72.31 40.41,72.31 40.59,72.49 v1(40.59,73.03)
D8: length 88.7
  TOP w0.203: v1(36.67,55.63) 36.67,54.95 36.75,54.86 36.75,54.18
  BOTTOM w0.203: v1(36.67,55.63) 36.67,55.09 36.6,55.02 36.6,49.08 35.92,48.39 35.92,40.01 35.71,39.8 19.3,39.8 19.1,39.6 19.1,37.41 18.9,37.21 17.3,37.21 17.09,37.01 17.09,29.39 16.89,29.18 3.02,29.18 2.82,29.39 2.82,53.04 3.02,53.24 J18.9
D9: length 93.3
  TOP w0.203: v1(37.41,55.63) 37.41,55.09 37.26,54.95 37.26,54.25
  BOTTOM w0.203: J18.10 8.46,52.15 6.56,52.15 5.8,52.91 3.16,52.91 3.15,52.9 3.15,29.52 3.16,29.51 16.75,29.51 16.76,29.52 16.76,37.14 17.16,37.54 18.76,37.54 18.77,37.55 18.77,39.74 19.17,40.13 35.38,40.13 35.59,40.34 35.59,48.53 36.27,49.22 36.27,54.39 35.54,55.13 35.54,55.57 36.33,56.36 37.2,56.36 37.41,56.16 v1(37.41,55.63)
D10: length 88.5
  TOP w0.203: 37.77,54.23 37.77,55.07 38.28,55.58 v1(38.28,56.11)
  BOTTOM w0.203: J18.11 6.24,51.47 6.24,52 5.66,52.58 3.48,52.58 3.48,31.17 4.8,29.84 15.11,29.84 16.43,31.17 16.43,37.28 17.02,37.87 17.65,37.87 18.44,38.67 18.44,39.87 19.03,40.46 35.03,40.46 35.23,40.67 35.23,48.64 35.94,49.35 35.94,54.26 35.21,54.99 35.21,55.7 36.2,56.69 37.69,56.69 v1(38.28,56.11)
D11: length 92.5
  TOP w0.203: 38.25,54.18 38.25,54.89 38.81,55.45 38.81,56.11 v1(39.27,56.57)
  BOTTOM w0.203: J18.12 8.46,49.61 6.56,49.61 5.91,50.26 5.91,51.86 5.52,52.25 4.01,52.25 3.81,52.04 3.81,31.34 4.98,30.18 14.98,30.18 16.1,31.3 16.1,38 18.89,40.79 34.89,40.79 34.9,40.8 34.9,48.78 35.61,49.49 35.61,54.12 34.88,54.85 34.88,55.84 36.11,57.07 38.23,57.07 38.73,56.57 v1(39.27,56.57)
D12: length 90.1
  TOP w0.203: 38.76,54.2 38.76,54.81 39.22,55.27 39.22,55.6 v1(40.03,56.41)
  BOTTOM w0.203: v1(40.03,56.41) 40.03,57.2 39.83,57.4 35.97,57.4 34.19,55.62 34.19,53.29 34.09,53.18 34.09,41.33 33.88,41.12 18.76,41.12 15.77,38.14 15.77,31.44 14.84,30.51 5.12,30.51 4.14,31.48 4.14,51.91 4.15,51.92 5.36,51.92 5.56,51.71 5.56,48.36 5.77,48.16 J18.13
D13: length 93.5
  TOP w0.203: v1(40.84,56.44) 40.11,55.7 39.98,55.7 39.6,55.32 39.6,55.07 39.27,54.74 39.27,54.23
  BOTTOM w0.203: v1(40.84,56.44) 40.84,57.53 40.64,57.73 35.84,57.73 33.86,55.76 33.86,53.42 33.73,53.29 33.73,51.15 33.76,51.13 33.76,41.46 33.75,41.45 18.62,41.45 15.44,38.28 15.44,31.58 14.7,30.84 5.25,30.84 4.47,31.62 4.47,51.59 5.22,51.59 5.23,51.58 5.23,48.22 6.39,47.07 8.46,47.07 J18.14
D14: length 79.9
  TOP w0.203: 39.75,54.23 39.75,54.61 39.95,54.81 39.95,55.01 40.47,55.52 40.84,55.52 40.84,55.53 41,55.53 v1(41.38,55.91)
  BOTTOM w0.203: J18.15 5,45.62 4.8,45.42 4.8,31.76 5.39,31.17 14.56,31.17 15.11,31.71 15.11,38.41 18.48,41.78 32.11,41.78 33.43,43.1 33.43,50.99 33.4,51.02 33.4,53.43 33.53,53.56 33.53,55.9 35.7,58.06 40.96,58.06 41.38,57.65 v1(41.38,55.91)
D15: length 83.3
  TOP w0.203: v1(41.99,55.19) 40.69,55.19 40.28,54.79 40.28,54.2
  BOTTOM w0.203: J18.16 8.46,44.53 6.56,44.53 6.06,45.02 5.77,45.02 5.13,44.38 5.13,31.89 5.53,31.5 13.03,31.5 14.19,32.66 14.19,33.4 13.88,33.71 13.88,34.16 14.78,35.06 14.78,38.55 18.34,42.11 31.97,42.11 33.1,43.24 33.1,50.85 33.07,50.88 33.07,53.57 33.2,53.7 33.2,56.2 33.38,56.37 33.38,56.9 35.66,59.18 36.78,59.18 36.88,59.08 36.88,58.6 37.08,58.39 41.1,58.39 41.99,57.51 v1(41.99,55.19)
FILTEREDIF1: length 50.7
  TOP w0.203: J18.22 10.64,38 11.1,38.46 v1(13.94,38.46) ; IC16.15 54.5,35.75 53.54,36.7 R101.1 v1(51.99,37.19)
  PWR w0.203: v1(32.23,39.04) 30.96,40.31 15.42,40.31 13.94,38.84 v1(13.94,38.46)
  BOTTOM w0.203: v1(51.99,37.19) 51.49,36.68 32.94,36.68 32.23,37.39 v1(32.23,39.04)
FILTEREDIF2: length 63.9
  TOP w0.203: IC17.15 65.57,34.86 64.82,35.61 R103.1 v1(63.4,36.09) ; v1(13.74,37.54) 11.63,37.54 J18.24
  PWR w0.203: v1(30.4,38.46) 28.02,36.07 15.21,36.07 v1(13.74,37.54)
  BOTTOM w0.203: v1(63.4,36.09) 62.73,35.43 57.45,35.43 56.93,35.94 56.93,36.18 56.62,36.49 54.91,36.49 54.51,36.09 30.61,36.09 30.4,36.3 v1(30.4,38.46)
IF1: length 68.2
  TOP w0.381: v1(37.16,11.58) 49.77,11.58 50.15,11.96 C133.1 ; IC4.5 27.37,30.47 27.08,30.18 21.63,30.18 21.38,29.92 C112.1 16.26,29.92 15.88,29.54 15.88,11.96 16.26,11.58 v1(31.52,11.58)
  BOTTOM w0.381: v1(31.52,11.58) v1(37.16,11.58)
IF2: length 69.4
  TOP w0.381: C135.2 67.48,10.29 67.09,9.91 34.21,9.91 33.83,10.29 33.83,29.41 34.21,29.79 C109.2 44.77,29.79 45.15,30.18 IC5.5
LATCH ENABLE: length 119.8
  TOP w0.203: 40.89,67.21 41.76,67.21 42.32,67.77 v1(42.32,71.32) ; v1(44.68,53.7) 44.68,52.68 44.6,52.6 43.6,52.6 43.45,52.45 41.02,52.45
  BOTTOM w0.203: J18.17 6.24,42.3 6.24,41.78 5.59,41.13 5.59,39.95 6.23,39.31 6.23,39.23 5.59,38.59 5.59,34.87 6.42,34.04 7.6,34.04 7.68,34.11 11.28,34.11 11.49,34.32 11.49,39 11.7,39.22 13.74,39.22 14.72,40.19 14.72,44.99 15.49,45.77 15.49,46.48 14.74,47.24 14.74,67.71 15.78,68.76 28.09,68.76 29.49,67.36 30.2,67.36 30.52,67.67 30.57,67.67 30.84,67.41 30.84,66.56 31.53,65.86 32.52,65.86 33.22,66.56 33.22,68.06 32.02,69.27 32.09,69.34 37.57,69.34 38.17,69.94 38.39,69.94 38.77,70.32 39.31,70.32 39.73,70.74 39.82,70.74 40.4,71.32 40.94,71.32 ; v1(42.32,71.32) 40.94,71.32 ; 40.94,71.32 40.94,71.09 41.25,70.79 42.77,70.79 42.98,70.59 42.98,67.95 42.6,67.57 42.6,65.71 43.59,64.72 43.59,61.29 43.63,61.24 43.63,54.73 43.05,54.15 43.05,53.7 43.37,53.39 44.37,53.39 v1(44.68,53.7)
LO1: length 19.1
  TOP w0.203: 29.58,52.39 IC8.4
  TOP w0.279: 29.46,52.27 29.58,52.39
  TOP w0.381: C107.1 21.01,44.07 21.36,44.42 28.91,44.42 29.34,44.86 29.34,52.15 29.46,52.27
LO2: length 18.1
  TOP w0.203: 30.9,52.39 IC8.6
  TOP w0.279: 31.01,52.27 30.9,52.39
  TOP w0.381: C89.1 38.4,44.07 38,44.48 31.6,44.48 31.22,44.86 31.22,52.07 31.01,52.27
OPT: length 59.6
  TOP w0.203: v1(31.06,70) 34.57,70 34.77,69.8 34.77,68.63 35.18,68.22 35.79,68.22
  BOTTOM w0.203: J18.19 8.01,40.54 9.1,41.63 10,41.63 11.09,40.54 13.19,40.54 13.4,40.74 13.4,68.24 15.36,70.21 30.33,70.21 30.53,70 v1(31.06,70)
OPT2: length 32.3
  TOP w0.203: v1(44.98,56.24) 44.12,57.1 36.7,57.1 35.97,56.37 35.97,53.42
  BOTTOM w0.203: v1(44.98,56.24) 46.4,54.82 46.4,51.5 46.08,51.17 46.08,42.95 46.28,42.75 J20.2
RFIN: length 9.4
  TOP w0.381: C155.1 L23.1 22.49,24.05 22.5,24.04 J6.1
RFOUT: length 2.6
  TOP w0.203: IC8.2 28.35,53.75
  TOP w0.33: 28.35,53.75 28.22,53.75
  TOP w0.381: 28.22,53.75 XTAL1.10
SERIAL CLOCK: length 120.5
  TOP w0.203: v1(42.48,72.96) 41.79,72.27 41.79,67.85 41.64,67.7 40.87,67.7 ; 41.02,52.96 42.62,52.96 v1(43.59,53.92)
  BOTTOM w0.203: 41.97,72.45 42.11,72.31 43.26,72.31 43.46,72.11 43.46,67.96 42.93,67.43 42.93,65.84 43.96,64.81 43.96,54.3 v1(43.59,53.92) ; 41.97,72.45 41.17,71.65 40.27,71.65 39.68,71.07 39.59,71.07 39.17,70.66 38.63,70.66 38.25,70.27 38.03,70.27 37.43,69.67 31.96,69.67 31.62,69.33 31.62,69.2 32.89,67.93 32.89,66.7 32.39,66.19 31.67,66.19 31.17,66.7 31.17,67.55 30.71,68 30.38,68 30.07,67.69 29.62,67.69 28.23,69.09 15.65,69.09 14.39,67.83 14.39,62.56 14.41,62.53 14.41,46.86 14.61,46.66 14.85,46.66 15.16,46.35 15.16,45.91 14.39,45.13 14.39,40.33 13.6,39.55 11.57,39.55 10.97,38.95 10.97,36.3 10.77,36.09 10.46,36.09 10,36.55 9.1,36.55 8.64,36.09 8.46,36.09 8.13,35.76 8.13,35.03 7.46,34.37 6.56,34.37 5.92,35.01 5.92,35.91 6.56,36.55 6.56,36.91 5.92,37.55 5.92,38.45 6.56,39.09 6.56,39.45 5.92,40.09 5.92,40.99 6.56,41.63 7.63,41.63 8.13,42.13 8.13,42.88 8.33,43.08 J18.18 ; 41.97,72.45 v1(42.48,72.96)
SERIAL INPUT: length 78.6
  TOP w0.203: v1(41.38,72.87) 41.38,68.4 41.17,68.2 40.82,68.2
  BOTTOM w0.203: v1(41.38,72.87) 41.38,72.34 41.02,71.98 40.13,71.98 39.55,71.4 39.45,71.4 39.04,70.99 38.5,70.99 38.12,70.6 37.9,70.6 37.29,70 31.82,70 31.29,69.47 31.29,69.07 32.56,67.79 32.56,66.84 32.25,66.52 31.81,66.52 31.5,66.84 31.5,67.68 29.65,69.53 15.62,69.53 14.06,67.97 14.06,40.47 13.47,39.88 11.43,39.88 10.64,39.09 10.64,37.55 10,36.91 8.46,36.91 J18.23
SERIAL INPUT2: length 27.5
  TOP w0.203: 41.02,53.47 42.19,53.47 42.39,53.67 42.39,54.66 42.6,54.86 v1(45.01,54.86)
  BOTTOM w0.203: v1(45.01,54.86) 45.21,54.66 45.21,53.47 45.01,53.27 45.01,52.65 45.21,52.45 45.75,52.45 46.07,52.13 46.07,51.63 45.75,51.31 45.75,42.81 46.75,41.81 53.21,41.81 J20.1
SERIAL/PARALLEL: length 79.9
  TOP w0.203: v1(32.84,56.59) 33.81,56.59 34.01,56.39 34.01,53.99 35.5,52.49 36.12,52.49 ; v1(30.89,65.43) 30.89,66.85 31.09,67.06 v1(32.03,67.06) 32.44,67.46 32.66,67.46 32.89,67.69 34.76,67.69 35.25,67.2 35.79,67.2
  BOTTOM w0.203: J18.21 8.1,39.09 10.01,39.09 11.12,40.21 13.33,40.21 13.73,40.6 13.73,68.1 15.5,69.88 27.86,69.88 27.88,69.86 30.02,69.86 32.03,67.86 v1(32.03,67.06) ; v1(32.84,56.59) 32.84,65.23 32.64,65.43 v1(30.89,65.43)
VG: length 67.4
  TOP w0.203: R44.2 v1(52.1,16.04) ; v1(52.1,16.04) 51.47,16.66 48.95,16.66 48.31,17.3 47.8,17.3 47.26,17.84 R47.1 ; v1(52.1,16.04) 52.1,17.1 R23.2 ; U7.3 58.01,4.37 58.22,4.17 62.5,4.17 63.16,4.83 R109.1 v1(64.57,5.33) ; R50.2 v1(67.44,15.14) 69.27,15.14 70.29,16.17 R51.1 ; R45.2 v1(62.74,11.95)
  BOTTOM w0.203: v1(52.1,16.04) 52.1,5.54 52.3,5.33 v1(64.57,5.33) ; v1(64.57,5.33) 64.57,11.75 64.36,11.95 v1(62.74,11.95) ; v1(64.57,5.33) 67.23,5.33 67.44,5.54 v1(67.44,15.14)
VTUNE: length 19.7
  TOP w0.203: XTAL1.2 12.47,55.4 12.27,55.19 12.27,40.74 12.06,40.54 J18.20
N20387: length 6.2
  TOP w0.203: R52.2 34.46,36 34.46,35.99 C128.2 34.46,34.12 34.46,34.12 C94.2
  TOP w0.381: L27.1 R52.2
N20505: length 5.1
  TOP w0.203: C125.2 37.11,39.65 37.12,39.63 C89.2
  TOP w0.381: C89.2 40.77,39.63 40.78,39.63 IC15.1
N20513: length 8.2
  TOP w0.381: IC15.3 38.54,36.62 38.53,36.63 L27.2 37.86,36.03 37.86,36.02 C92.2 37.86,34.66 36.61,33.4 C91.1
N20525: length 3
  TOP w0.381: C91.2 38.22,32.87 39.1,33.75 39.17,33.75 39.19,33.77 IC5.1
N21779: length 5.4
  TOP w0.203: C111.2 16.78,34.37 16.78,34.37 C127.2 16.78,36.25 16.78,36.25 R55.2
  TOP w0.381: L28.1 R55.2
N21911: length 5.2
  TOP w0.203: C124.2 19.68,39.85 19.7,39.86 C107.2
  TOP w0.381: IC14.1 23.38,39.88 23.36,39.86 C107.2
N21919: length 9.5
  TOP w0.381: 20.41,36.88 21.21,36.88 21.21,36.88 IC14.3 ; 20.41,36.88 20.41,36.07 20.41,36.06 C110.2 20.41,34.94 18.93,33.45 C166.2 ; 20.41,36.88 L28.2
N21931: length 2.9
  TOP w0.381: C166.1 20.54,32.99 21.42,33.87 21.49,33.87 21.51,33.89 IC4.1
N24382: length 6.4
  TOP w0.203: R19.1 53.31,6.3 53.41,6.4 R18.2 54.79,6.88 54.8,6.87 C130.2 56.75,6.87 57.12,7.25 U7.1
N26627: length 4.2
  TOP w0.381: C135.1 64.71,13.34 64.7,13.35 R45.1 62.72,13.35 62.7,13.34 U8.5
N27571: length 5.7
  TOP w0.203: VR1.3 67.05,20.49 66.23,19.67 R46.1
N27840: length 11.2
  TOP w0.203: U8.6 64.07,14.61 64.6,15.14 R50.1 65.16,15.62 65.16,15.63 C136.2 65.16,17.69 66.09,18.62 68.1,18.62 68.3,18.82 VR1.2
N29245: length 4.5
  TOP w0.381: U8.3 55.15,14.61 55.12,14.64 R44.1 53.11,14.64 53.1,14.66 C133.2
N29273: length 11.6
  TOP w0.203: VR2.2 51.31,19.48 50.76,18.94 C132.2 51.42,18.08 51.72,18.38 R23.1 52.74,18.38 55.24,15.88 U8.2
N36972: length 2.6
  TOP w0.203: 35.66,65.22 35.25,65.22
  TOP w0.279: 35.15,65.21 35.24,65.21 35.25,65.22
  TOP w0.381: 35.15,65.21 C161.2
N37084: length 2.5
  TOP w0.203: 36.02,50.47 35.64,50.47 35.5,50.61 35.41,50.61
  TOP w0.279: 35.41,50.61 35.23,50.61
  TOP w0.381: 35.23,50.61 C162.2
N37086: length 3.6
  TOP w0.203: 41.07,50.44 41.5,50.44
  TOP w0.381: 41.5,50.44 41.66,50.44 41.8,50.3 L22.1 44,50.3 44.02,50.29 C151.1
N37118: length 6.1
  TOP w0.203: 30.89,55.11 IC8.10
  TOP w0.279: 30.96,55.11 30.89,55.11
  TOP w0.381: 30.96,55.11 33.3,55.11 33.53,54.88 C162.1 33.53,51.61
N46082: length 1.6
  TOP w0.203: C136.1 R51.2
N63774: length 4.9
  TOP w0.203: R21.1 56.77,20.76 55.63,21.91 55.63,23.63 55.42,23.83 VR2.3
N69862: length 2.8
  TOP w0.203: R47.2 48.22,19.49 48.23,19.48 48.36,19.48 48.91,18.94 C132.1
N90361: length 10.4
  TOP w0.203: 29.74,55.39 IC8.12
  TOP w0.279: 29.74,55.52 29.74,55.39
  TOP w0.381: C161.1 33.05,61.49 29.74,58.19 29.74,55.52
N94399: length 3.4
  TOP w0.203: 41.1,65.2 40.72,65.2
  TOP w0.279: 41.1,65.2 41.33,65.2 41.49,65.04
  TOP w0.381: C143.1 43.43,65.02 43.42,65.04 L17.1 41.49,65.04
N94665: length 3.8
  TOP w0.381: C143.2 46.33,65.02 C144.2 47.38,65.03 47.38,65.02 ; 47.38,65.02 47.38,65.03 IC9.3 ; 47.38,65.02 47.87,64.53 IC9.4
N95021: length 6.3
  TOP w0.203: R78.2 46.46,67.81 46.99,67.28 47.88,67.28 48.08,67.08 IC9.1
N95051: length 3
  TOP w0.203: IC9.14 49.83,67.8 49.16,68.47 R79.2
N95080: length 1.5
  TOP w0.203: R79.1 L18.2
N95927: length 9
  TOP w0.203: R80.2 55.48,71.4 55.49,71.4 C145.1 55.49,69.17 55.65,69.01 C146.2 55,68.35 54.75,68.1 R81.2 54.14,65.7 54,65.56 53.51,65.56 53.49,65.54 L19.1
N96935: length 3.3
  TOP w0.203: R81.1 52.59,67.19 52.27,66.88 51.29,66.88 51.08,66.67 IC9.12
N96980: length 5.5
  TOP w0.381: IC9.10 51.37,65.03 51.87,64.53 ; 55.58,64.49 C148.1 C147.2 54.24,64.5 L19.2 51.89,64.5 51.87,64.53 ; 51.87,64.53 IC9.9
N97603: length 9.2
  TOP w0.381: C148.2 J8.1
N98654: length 1.6
  TOP w0.203: R84.1 L20.2
N98662: length 8.2
  TOP w0.203: R82.2 55.92,56.23 55.92,56.23 C149.1 55.92,54.01 55.78,53.87 C150.2 R87.2 54.27,52.36 53.57,51.66 L21.1
